# Altium PCB main.PcbDoc
Units mm, origin at the board's own origin, x right, y up, seen from the top; angles counter-clockwise.
Board outline 45.41 x 30.51 mm, 2 copper layers (Top Layer, Bottom Layer); 27 components, 19 nets, 139 pads, 0 vias.
Unrouted connection lines stored in the file: 52.
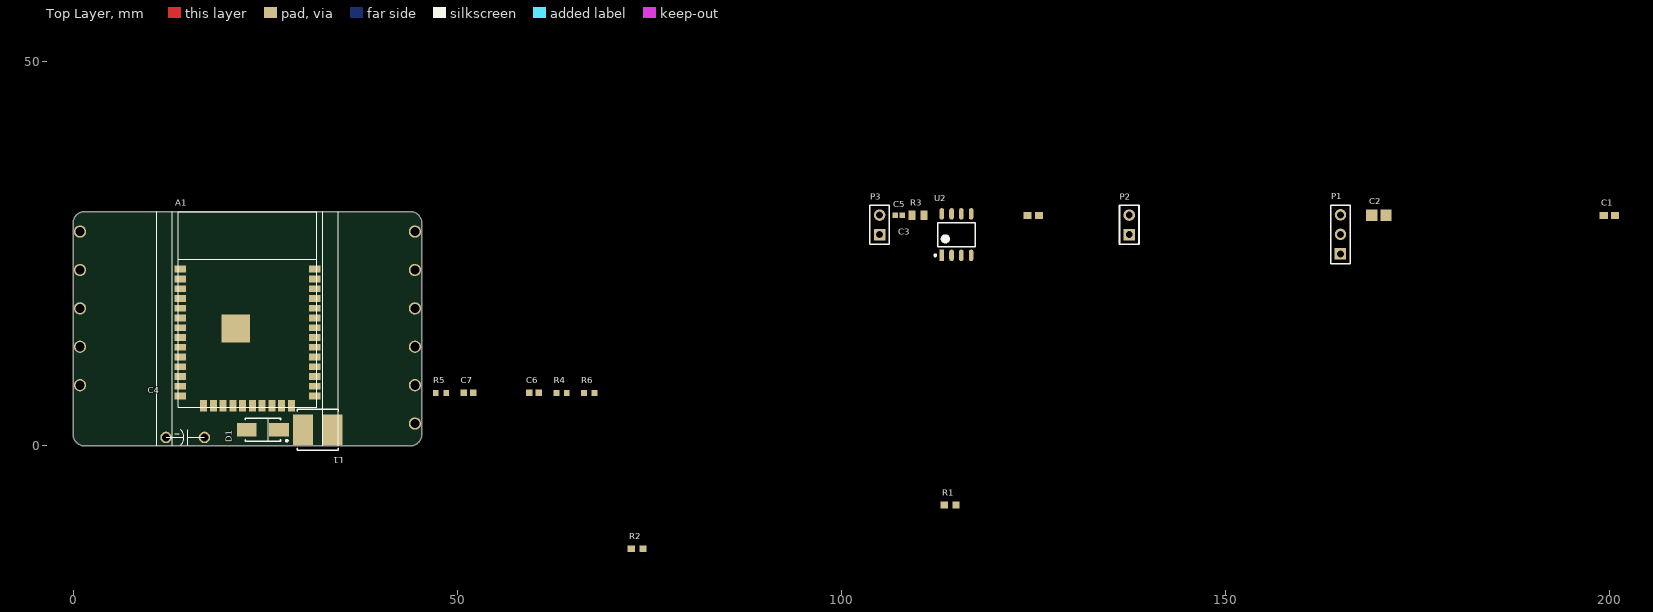
[diagram p0: Top Layer view]
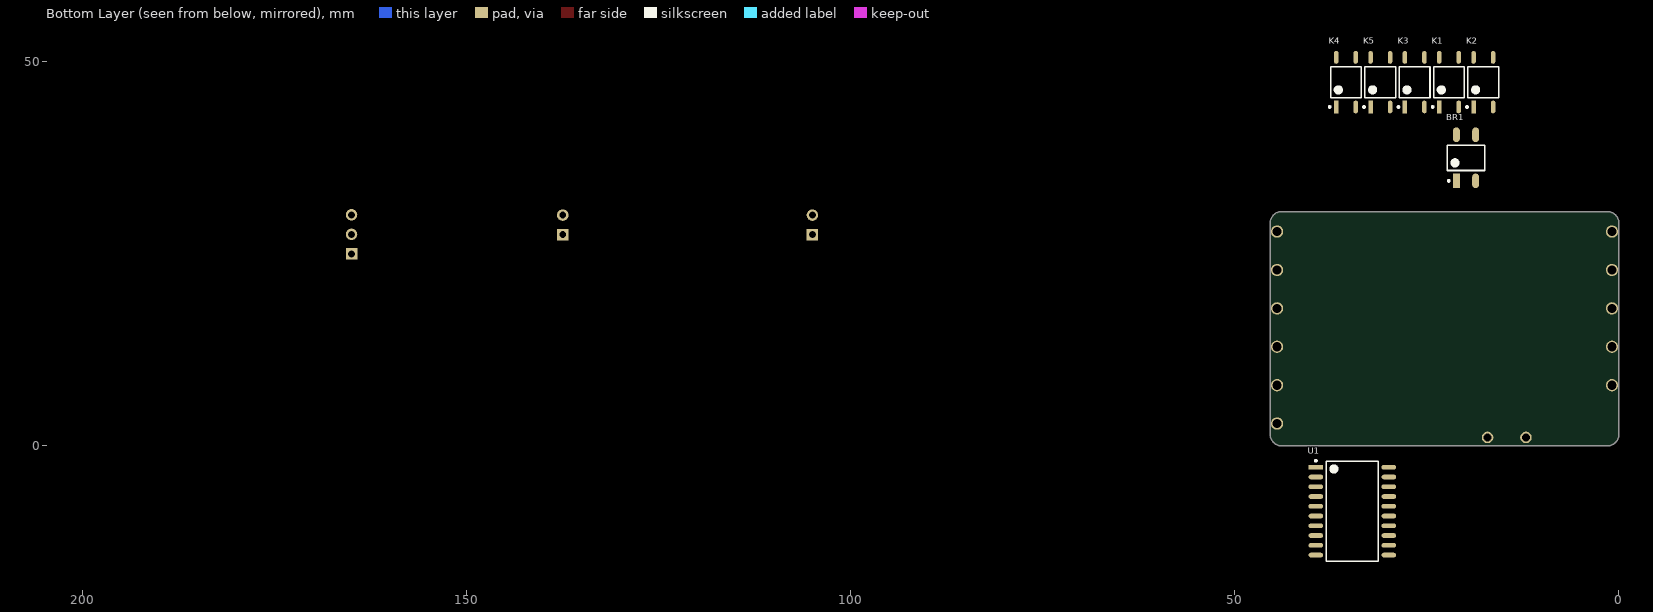
[diagram p1: Bottom Layer view, seen from below]

## Layer stack, top to bottom
Top Solder: solder mask 0.0102, Solder Resist, Dk 3.5
Top Layer: signal copper 0.0356
Dielectric 1: dielectric 0.32, FR-4, Dk 4.8
Bottom Layer: signal copper 0.0356
Bottom Solder: solder mask 0.0102, Solder Resist, Dk 3.5

## Board outline
1.5,-0.003 cw(c1.5,1.5) -0.003,1.5 0,1.5 0,29 -0.003,29 cw(c1.5,29) 1.5,30.503 1.5,30.5 43.9,30.5 43.9,30.503 cw(c43.9,29) 45.403,29 45.4,29 45.4,1.5 45.403,1.5 cw(c43.9,1.5) 43.9,-0.003 43.9,0

## Design rules (kind name [scope] priority, off if disabled: settings)
BoardOutlineClearance JLC_BoardOutlineClearance_Silk [OnLayer('Top Overlay')  or   OnLayer('Bottom Overlay')] p1: gap=0 ignorepadtopadclearanceinfootprint=FALSE
BoardOutlineClearance JLC_BoardOutlineClearance_Single [All] p2: gap=0.4 ignorepadtopadclearanceinfootprint=FALSE except(0: Arc-SplitContinuation Track-SplitContinuation SMDPad-SplitContinuation THPad-SplitContinuation Via-SplitContinuation Fill-SplitContinuation Poly-SplitContinuation Region-SplitContinuation Text-SplitContinuation; 0.2: Arc-OutlineEdge Track-OutlineEdge SMDPad-OutlineEdge THPad-OutlineEdge Via-OutlineEdge Fill-OutlineEdge Poly-OutlineEdge Region-OutlineEdge Text-OutlineEdge)
BoardOutlineClearance JLC_BoardOutlineClearance_Panel [All] p3: gap=0.4 ignorepadtopadclearanceinfootprint=FALSE except(0: Arc-SplitContinuation Track-SplitContinuation SMDPad-SplitContinuation THPad-SplitContinuation Via-SplitContinuation Fill-SplitContinuation Poly-SplitContinuation Region-SplitContinuation Text-SplitContinuation)
Clearance JLC_Clearance_SB [(HasFootprint('0603 Solder Bridge-Footprint-1'))] p1: gap=0.127 ignorepadtopadclearanceinfootprint=FALSE except(0: Fill-Hole Poly-Hole Region-Hole Text-Hole; 0.254: SMDPad-Fill SMDPad-Poly SMDPad-Region THPad-Fill THPad-Poly THPad-Region Via-Fill Via-Poly Via-Region)
Clearance JLC_Clearance_Top [All] p2: gap=0.127 ignorepadtopadclearanceinfootprint=FALSE except(0: Fill-Hole Poly-Hole Region-Hole Text-Hole; 0.2: SMDPad-Poly THPad-Poly Via-Poly)
ComponentClearance JLC_ComponentClearance [All] p1: gap=0 collisioncheckmode=3 verticalgap=0 showdistances=FALSE
ComponentOrientations JLC_ComponentOrientations [All] p1: allowedrotations=32
DiffPairsRouting [All] p1: maxlimit=0.254 minlimit=0.127 mostfreqgap=0.127 toplayer_minwidth=0.127 toplayer_maxwidth=0.254 toplayer_prefwidth=0.127 bottomlayer_minwidth=0.127 bottomlayer_maxwidth=0.254 bottomlayer_prefwidth=0.127 maxuncoupledlength=12.7
Height JLC_Height [All] p1: minheight=0 maxheight=2539.975 prefheight=12.7
HoleSize JLC_HoleSize [All] p1: absolutevalues=TRUE maxlimit=6.35 minlimit=0.3 maxpercent=80.000 minpercent=20.000
HoleToHoleClearance JLC_HoleToHoleClearance [All] p1: gap=0.254 allowstackedmicrovias=TRUE
MinimumAnnularRing JLC_MinimumAnnularRing [All] p1: minimumring=0.13
MinimumSolderMaskSliver JLC_MinimumSolderMaskSliver [All] p1: minsoldermaskwidth=0
PlaneClearance [All] p1: clearance=0.2
PlaneConnect [All] p1: planeconnectstyle=Relief reliefexpansion=0.15 reliefentries=4 reliefconductorwidth=0.254 reliefairgap=0.2
PolygonConnect [All] p1: connectstyle=Relief reliefconductorwidth=0.254 reliefentries=4 polygonreliefangle="90 Angle" airgapwidth=0.2
RoutingVias JLC_RoutingVias [All] p1: holewidth=0.3 width=0.6 viastyle="Through Hole" minholewidth=0.3 minwidth=0.6 maxholewidth=6.35 maxwidth=12.7
SilkToSilkClearance JLC_SilkToSilkClearance [All] p1: silktosilkclearance=0
SilkToSolderMaskClearance JLC_SilkToSolderMaskClearance [IsPad] p1: minsilkscreentomaskgap=0 clearancetoexposedcopper=TRUE
SolderMaskExpansion [All] p1: expansion=0.05 istentingtop=FALSE
Width JLC_Width [All] p1: maxlimit=12.7 minlimit=0.127 preferedwidth=0.254
20 further rules are at their usual default settings.

## Components (designator, comment, footprint, x,y, rotation, side; value= is the part's Value field where it differs from the comment)
A1 "ESP32-WROOM-32D" ESP32-WROOM-32D 22.7,23 r0 top
BR1 "DB 100V 0A8" "miniDIP 4" 19.9,37.5 r90 bottom
C1 "100n 16V" "CAP 0603 MD" 200,30 r0 top
C2 "10u 16V" "CAP 0805 LD" 170,30 r0 top
C3 "1u 25V" "CAP 0603 MD" 125,30 r0 top
C4 "330u 50V" "ELECTROLYTIC CAP D10 lifted" 14.6,1.1 r0 top
C5 "10n 50V" CAP0402X07 107.5,30 r0 top
C6 "100n 16V" "CAP 0603 HD" 60,6.9 r0 top
C7 "1n5 50V" "CAP 0603 HD" 51.5,6.9 r0 top
D1 "DS -50V 700mV 1A" DO-214AC 24.7,2.1 r180 top
K1 "TLP266J" "11-4M1S MD" 22.12,47.346 r90 bottom
K2 "TLP266J" "11-4M1S MD" 17.65,47.346 r90 bottom
K3 "TLP266J" "11-4M1S MD" 26.59,47.346 r90 bottom
K4 "TLP266J" "11-4M1S MD" 35.53,47.346 r90 bottom
K5 "TLP266J" "11-4M1S MD" 31.06,47.346 r90 bottom
L1 "150u A560 R949" "IND 5050X45 MD" 31.85,2.1 r180 top
P1 "Header 3" HDR1X3 165,25 r90 top
P2 "Header 2" HDR1X2 137.5,27.5 r90 top
P3 "Header 2" HDR1X2 105,27.5 r90 top
R1 "10k 1% 0W1" "RES 0603 MD" 114.175,-7.7 r0 top
R2 "10k 1% 0W1" "RES 0603 MD" 73.425,-13.4 r0 top
R3 "0R5 1% 0W33" "RES 0805 HD" 110,30 r0 top
R4 "36k 0.5 52m5" "RES 0603 HD" 63.6,6.9 r0 top
R5 "22k 1% 0W1" "RES 0603 HD" 47.9,6.9 r0 top
R6 "12k 1% 0W1" "RES 0603 HD" 67.2,6.9 r0 top
U1 "SN74ACT244DWR" "SOIC 20 w7.5 MD" 34.7,-8.5 r180 bottom
U2 "NCP3064BDR2G" "soic-8 md" 115,27.5 r90 top

## Footprints (in the part's own frame and the unit in brackets; to place one, negate y for a bottom-side part, rotate by r counter-clockwise, add the part's x,y. Pads: shape width x height; smd on the part's side, far side on the other; paste and mask are expansions set on the pad)
"11-4M1S MD" [mm] "SOP, 4-Leads, Body 3.75x4.60mm, Pitch 2.54mm, IPC Medium Density"
  rect 1.65x0.6 smd: 1(-3.225,1.27)
  oval 1.65x0.6 smd: 3(-3.225,-1.27) 4(3.225,-1.27) 6(3.225,1.27)
  silkscreen extent -3.35,-2 2,2.25, body extent -3.5,-2 3.5,2, height 2.2
CAP0402X07 [mm] "Chip Capacitor, 2-Leads, Body 1.00x0.50mm, IPC Medium Density"
  rect 0.72x0.72 smd: 1(-0.45,0) 2(0.45,0)
  body extent -0.6,-0.35 0.6,0.35, height 0.7
"CAP 0603 HD" [mm] "Chip Capacitor, 2-Leads, Body 1.60x0.80mm, IPC High Density"
  rect 0.85x0.85 smd: 1(-0.625,0) 2(0.625,0)
  body extent -0.85,-0.45 0.85,0.45, height 0.9
"CAP 0603 MD" [mm] "Chip Capacitor, 2-Leads, Body 1.60x0.80mm, IPC Medium Density"
  rect 1.05x0.95 smd: 1(-0.725,0) 2(0.725,0)
  body extent -0.85,-0.45 0.85,0.45, height 0.9
"CAP 0805 LD" [mm] "Chip Capacitor, 2-Leads, Body 2.00x1.25mm, IPC Low Density"
  rect 1.45x1.5 smd: 1(-0.925,0) 2(0.925,0)
  body extent -1.1,-0.67 1.1,0.67, height 1.35
DO-214AC [mm] "Molded Diode, 2-Leads, Body 4.29x2.61mm, IPC Medium Density"
  rect 2.55x1.75 smd: 1(-2.1,0) 2(2.1,0)
  silkscreen extent -3.25,-1.5 2.3,1.55, body extent -2.5,-1.46 2.5,1.46, height 2.44
"ELECTROLYTIC CAP D10 lifted" [mm]
  round 1.5 hole 1 mask+0.05: 1(-2.5,0) 2(2.5,0)
  silkscreen extent -2.5,-1 2.5,1
ESP32-WROOM-32D [mm]
  rect 1.5x0.9 smd mask+0.05: 1(-8.75,0) 2(-8.75,-1.27) 3(-8.75,-2.54) 4(-8.75,-3.81) 5(-8.75,-5.08) 6(-8.75,-6.35) 7(-8.75,-7.62) 8(-8.75,-8.89) 9(-8.75,-10.16) 10(-8.75,-11.43) 11(-8.75,-12.7) 12(-8.75,-13.97) 13(-8.75,-15.24) 14(-8.75,-16.51) 25(8.75,-16.51) 26(8.75,-15.24) 27(8.75,-13.97) 28(8.75,-12.7) 29(8.75,-11.43) 30(8.75,-10.16) 31(8.75,-8.89) 32(8.75,-7.62) 33(8.75,-6.35) 34(8.75,-5.08) 35(8.75,-3.81) 36(8.75,-2.54) 37(8.75,-1.27) 38(8.75,0)
  rect 0.9x1.5 smd mask+0.05: 15(-5.715,-17.76) 16(-4.445,-17.76) 17(-3.175,-17.76) 18(-1.905,-17.76) 19(-0.635,-17.76) 20(0.635,-17.76) 21(1.905,-17.76) 22(3.175,-17.76) 23(4.445,-17.76) 24(5.715,-17.76)
  rect 3.7x3.7 smd mask+0.05: 39(-1.5,-7.72)
  silkscreen extent -9,-18 9,7.5, body extent -9,-18 8.9,7.4, height 2.62
HDR1X2 [mm] "Connector; Header; 2 Position"
  rect 1.5x1.5 hole 0.9: 1(0,0)
  round 1.5 hole 0.9: 2(2.54,0)
  silkscreen extent -1.27,-1.27 3.81,1.27
HDR1X3 [mm] "Connector; Header; 3 Position"
  rect 1.5x1.5 hole 0.9: 1(0,0)
  round 1.5 hole 0.9: 2(2.54,0) 3(5.08,0)
  silkscreen extent -1.27,-1.27 6.35,1.27
"IND 5050X45 MD" [mm] "Precision Wire Wound Inductor, 2-Leads, Body 5.00x5.00mm, IPC Medium Density"
  rect 2.6x4 smd: 1(-1.95,0) 2(1.95,0)
  silkscreen extent -2.65,-2.65 2.65,2.65, body extent -2.6,-2.5 2.6,2.5, height 4.6
"miniDIP 4" [mm] "SOP, 4-Leads, Body 4.70x3.80mm, Pitch 2.50mm, IPC Medium Density"
  rect 1.9x0.9 smd: 1(-3,1.25)
  oval 1.9x0.9 smd: 2(-3,-1.25) 3(3,-1.25) 4(3,1.25)
  silkscreen extent -3.12,-2.45 1.65,2.45, body extent -3.5,-2.45 3.5,2.45, height 3
"RES 0603 HD" [mm] "Chip Resistor, 2-Leads, Body 1.60x0.80mm, IPC High Density"
  rect 0.75x0.8 smd: 1(-0.675,0) 2(0.675,0)
  body extent -0.9,-0.45 0.9,0.45, height 0.55
"RES 0603 MD" [mm] "Chip Resistor, 2-Leads, Body 1.60x0.80mm, IPC Medium Density"
  rect 0.95x0.9 smd: 1(-0.775,0) 2(0.775,0)
  body extent -0.9,-0.45 0.9,0.45, height 0.55
"RES 0805 HD" [mm] "Chip Resistor, 2-Leads, Body 2.00x1.25mm, IPC High Density"
  rect 0.95x1.25 smd: 1(-0.775,0) 2(0.775,0)
  body extent -1.1,-0.67 1.1,0.67, height 0.6
"SOIC 20 w7.5 MD" [mm] "SOIC, 20-Leads, Body 12.80x7.50mm, Pitch 1.27mm, IPC Medium Density"
  rect 1.9x0.6 smd: 1(-4.75,5.715)
  oval 1.9x0.6 smd: 2(-4.75,4.445) 3(-4.75,3.175) 4(-4.75,1.905) 5(-4.75,0.635) 6(-4.75,-0.635) 7(-4.75,-1.905) 8(-4.75,-3.175) 9(-4.75,-4.445) 10(-4.75,-5.715) 11(4.75,-5.715) 12(4.75,-4.445) 13(4.75,-3.175) 14(4.75,-1.905) 15(4.75,-0.635) 16(4.75,0.635) 17(4.75,1.905) 18(4.75,3.175) 19(4.75,4.445) 20(4.75,5.715)
  silkscreen extent -4.88,-6.5 3.4,6.69, body extent -5.15,-6.5 5.15,6.5, height 2.65
"soic-8 md" [mm] "SOIC, 8-Leads, Body 4.90x3.90mm, Pitch 1.27mm, IPC Medium Density"
  rect 1.5x0.6 smd: 1(-2.7,1.905)
  oval 1.5x0.6 smd: 2(-2.7,0.635) 3(-2.7,-0.635) 4(-2.7,-1.905) 5(2.7,-1.905) 6(2.7,-0.635) 7(2.7,0.635) 8(2.7,1.905)
  silkscreen extent -2.82,-2.45 1.55,2.88, body extent -3,-2.45 3,2.45, height 1.75

## Part data
BR1: "Bridge Rectifier 100V 0.8A MiniDIP SMD4", Average Rectified Current=800mA, Capacitance=10pF, Case/Package=SMD/SMT, Forward Current=400mA, Forward Voltage=1V, Manufacturer 1=Diodes, Manufacturer Part Number 1=HD01-T, Max Forward Surge Current (Ifsm)=30A, Max Operating Temperature=150°C, Max Repetitive Reverse Voltage (Vrrm)=100V, Max Reverse Current=5uA, Min Operating Temperature=-55°C, Package Quantity=3000, Reverse Voltage (DC)=70V, Supplier Part Number 1=HD01DICT-ND, Category="Rectifier Diodes", ComponentLink1Description=https://datasheet.ciiva.com/11196/ds17003-11196328.pdf?src-supplier=Avnet, ComponentLink1URL=https://datasheet.ciiva.com/11196/ds17003-11196328.pdf?src-supplier=Avnet, ComponentLink2Description=https://datasheet.ciiva.com/34302/1540412-34302391.pdf?src-supplier=Jameco, ComponentLink2URL=https://datasheet.ciiva.com/34302/1540412-34302391.pdf?src-supplier=Jameco, ComponentLink3Description=https://datasheet.ciiva.com/4433/ds17003-4433579.pdf?src-supplier=Mouser, ComponentLink3URL=https://datasheet.ciiva.com/4433/ds17003-4433579.pdf?src-supplier=Mouser, ComponentLink4Description=https://datasheet.ciiva.com/16583/ds17003-16583723.pdf?src-supplier=Avnet+Europe, ComponentLink4URL=https://datasheet.ciiva.com/16583/ds17003-16583723.pdf?src-supplier=Avnet+Europe, ComponentLink5Description=https://datasheet.ciiva.com/1175/ds17003-1175220.pdf?src-supplier=Element14, ComponentLink5URL=https://datasheet.ciiva.com/1175/ds17003-1175220.pdf?src-supplier=Element14, ComponentLink6Description=https://datasheet.ciiva.com/16358/ds17003-16358441.pdf?src-supplier=Future+Electronics, ComponentLink6URL=https://datasheet.ciiva.com/16358/ds17003-16358441.pdf?src-supplier=Future+Electronics, ComponentLink7Description=https://datasheet.ciiva.com/15224/getdatasheetpartid-142523-15224709.pdf?src-supplier=Verical, ComponentLink7URL=https://datasheet.ciiva.com/15224/getdatasheetpartid-142523-15224709.pdf?src-supplier=Verical, Contact Plating=Tin,Matte, Current Rating=800mA, Element Configuration=Single, Height=2.7mm, Lead Free="Lead Free", Length=4.9mm, Max Surge Current=30A, Mount="Surface Mount", Number of Elements=1, Number of Pins=4, Output Current=800mA, Packaging="Tape and Reel", Peak Non-Repetitive Surge Current=30A, Pricing 1="1=0.45000, 10=0.36200, 100=0.24640, 500=0.18480, 1000=0.13860 (USD)", Radiation Hardening=No, REACH SVHC="No SVHC", RoHS=Yes, RoHS Compliant=Yes, Series=-, Stock 1=99228, Supplier 1=Digi-Key, Termination=SMD/SMT, Voltage Rating (DC)=100V, Width=4mm
C1 C6: library part "CAP 100n 16V 0603", "CAP CER 0.1UF 16V X7R 0603", Capacitance=100nF, Case Code (Imperial)=0603, Case Code (Metric)=1608, Dielectric=X7R, Dielectric Material=Ceramic, Manufacturer 1=KEMET, Manufacturer Part Number 1=C0603C104M4RACTU, Max Operating Temperature=125°C, Min Operating Temperature=-55°C, Package Quantity=1, Supplier Part Number 1=399-1099-1-ND, Tolerance=20%, Voltage Rating=16V, Case/Package=0603, Category="Ceramic Capacitors", ComponentLink1Description=https://datasheet.ciiva.com/18102/getdatasheetpartid-66190-18102310.pdf?src-supplier=Verical, ComponentLink1URL=https://datasheet.ciiva.com/18102/getdatasheetpartid-66190-18102310.pdf?src-supplier=Verical, ComponentLink2Description=https://datasheet.ciiva.com/7823/kem-c1002-x7r-smd-7823992.pdf?src-supplier=Element14, ComponentLink2URL=https://datasheet.ciiva.com/7823/kem-c1002-x7r-smd-7823992.pdf?src-supplier=Element14, ComponentLink3Description=https://datasheet.ciiva.com/7823/kem-c1002-x7r-smd-7823993.pdf?src-supplier=Element14, ComponentLink3URL=https://datasheet.ciiva.com/7823/kem-c1002-x7r-smd-7823993.pdf?src-supplier=Element14, ComponentLink4Description=https://datasheet.ciiva.com/14589/70095383-14589450.pdf?src-supplier=Allied+Electronics, ComponentLink4URL=https://datasheet.ciiva.com/14589/70095383-14589450.pdf?src-supplier=Allied+Electronics, ComponentLink5Description=https://datasheet.ciiva.com/18192/getdatasheetpartid-302288-18192716.pdf?src-supplier=Verical, ComponentLink5URL=https://datasheet.ciiva.com/18192/getdatasheetpartid-302288-18192716.pdf?src-supplier=Verical, Depth=0.8mm, Height=0.8mm, Lead Pitch=0.7mm, Length=1.6mm, Mount="Surface Mount,PCB", Number of Pins=2, Packaging="Tape and Reel", Pricing 1="1=0.10000, 10=0.03500, 50=0.01880, 100=0.01540, 500=0.01102, 1000=0.00865 (USD)", Radiation Hardening=No, REACH SVHC="No SVHC", RoHS=Yes, Stock 1=125497, Supplier 1=Digi-Key, Termination=SMD/SMT, Thickness=0.034inch, Voltage Rating (DC)=16V, Width=0.031inch
C2: library part "CAP 10u 16V 0805", "SAMSUNG ELECTRO-MECHANICS - CL21A106KOQNNNE - SMD Multilayer Ceramic Capacitor, 10 µF, 16 V, 0805 [2012 Metric], ± 10%, X5R, CL Series", Capacitance=10uF, Case Code (Imperial)=0805, Case Code (Metric)=2012, Dielectric=X7R, Manufacturer 1=Samsung, Manufacturer Part Number 1=CL21A106KOQNNNE, Max Operating Temperature=85°C, Min Operating Temperature=-55°C, Package Quantity=1, Supplier Part Number 1=1276-1096-1-ND, Tolerance=10%, Voltage=16V, Case/Package=0805, Category="Ceramic Capacitors", ComponentLink1Description=https://datasheet.ciiva.com/25798/cl21a106koqnnne-25798133.pdf?src-supplier=Digi-Key, ComponentLink1URL=https://datasheet.ciiva.com/25798/cl21a106koqnnne-25798133.pdf?src-supplier=Digi-Key, ComponentLink2Description=https://datasheet.ciiva.com/15216/getdatasheetpartid-358435-15216234.pdf?src-supplier=Verical, ComponentLink2URL=https://datasheet.ciiva.com/15216/getdatasheetpartid-358435-15216234.pdf?src-supplier=Verical, ComponentLink3Description=https://datasheet.ciiva.com/16740/cl05b104kq5nnnc-16740697.pdf?src-supplier=Future+Electronics, ComponentLink3URL=https://datasheet.ciiva.com/16740/cl05b104kq5nnnc-16740697.pdf?src-supplier=Future+Electronics, Depth=1.25mm, Height=1.25mm, Lead Free="Lead Free", Length=2mm, Mount="Surface Mount", Packaging="Tape and Reel", Pricing 1="1=0.11000, 10=0.07600, 50=0.04340, 100=0.03590, 500=0.02516, 1000=0.02083 (USD)", Radiation Hardening=No, RoHS=Yes, Stock 1=920017, Supplier 1=Digi-Key, Thickness=0.055inch, Voltage Rating=16V, Voltage Rating (DC)=16V, Width=0.049inch
C3: library part "CAP 1u 25V 0603", "SAMSUNG ELECTRO-MECHANICS - CL10B105KA8NNNC - SMD Multilayer Ceramic Capacitor, 1 µF, 25 V, 0603 [1608 Metric], ± 10%, X7R, CL Series", Capacitance=1uF, Case Code (Imperial)=0603, Case Code (Metric)=1608, Dielectric=X7R, Manufacturer 1=Samsung, Manufacturer Part Number 1=CL10B105KA8NNNC, Max Operating Temperature=125°C, Min Operating Temperature=-55°C, Package Quantity=1, Supplier Part Number 1=1276-1184-1-ND, Tolerance=10%, Voltage=25V, Case/Package=0603, Category="Ceramic Capacitors", ComponentLink1Description=https://datasheet.ciiva.com/16449/cl10b105ka8nnnc-16449544.pdf?src-supplier=Future+Electronics, ComponentLink1URL=https://datasheet.ciiva.com/16449/cl10b105ka8nnnc-16449544.pdf?src-supplier=Future+Electronics, ComponentLink2Description=https://datasheet.ciiva.com/15195/getdatasheetpartid-359554-15195726.pdf?src-supplier=Verical, ComponentLink2URL=https://datasheet.ciiva.com/15195/getdatasheetpartid-359554-15195726.pdf?src-supplier=Verical, Contact Plating=Tin, Depth=0.8mm, Height=0.8mm, Length=1.6mm, Mount="Surface Mount", Packaging="Tape and Reel", Pricing 1="1=0.10000, 10=0.05100, 50=0.02780, 100=0.02260, 500=0.01618, 1000=0.01271 (USD)", Radiation Hardening=No, RoHS=Yes, Stock 1=3430244, Supplier 1=Digi-Key, Thickness=0.035inch, Voltage Rating=25V, Width=0.031inch
C4: library part "CAP-EL 330u 50V"
C5: library part "CAP 10n 0402", "10nF ±10% 50V X7R 0402 Multilayer Ceramic Capacitors MLCC - SMD/SMT RoHS", LCSC Part #=C466608
C7: library part "CAP 1n5 50V 0603", "Multilayer Ceramic Capacitors MLCC - SMD/SMT 50V 1500pF X7R 0603 10% Tol", Capacitance=1.5nF, Case Code (Imperial)=0603, Case Code (Metric)=1608, Dielectric=X7R, Manufacturer 1="Kyocera AVX", Manufacturer Part Number 1=06035C152KAT4A, Max Operating Temperature=125°C, Min Operating Temperature=-55°C, Supplier Part Number 1=478-13035-1-ND, Tolerance=10%, Voltage Rating (DC)=50V, Case/Package=0603, Category="Ceramic Capacitors", ComponentLink1Description=https://datasheet.ciiva.com/11537/cx7r-11537941.pdf?src-supplier=Avnet, ComponentLink1URL=https://datasheet.ciiva.com/11537/cx7r-11537941.pdf?src-supplier=Avnet, ComponentLink2Description=https://datasheet.ciiva.com/13266/cx7r-218113-13266958.pdf?src-supplier=Mouser, ComponentLink2URL=https://datasheet.ciiva.com/13266/cx7r-218113-13266958.pdf?src-supplier=Mouser, Construction=Flat, Depth=0.81mm, Height=0.9mm, Length=1.6mm, Mount="Surface Mount", Number of Pins=2, Packaging="Tape and Reel", Pricing 1="1=0.10000, 10=0.07000, 50=0.03800, 100=0.03100, 500=0.02214, 1000=0.01739, 2500=0.01581, 5000=0.01455 (USD)", Radiation Hardening=No, RoHS=Yes, RoHS Compliant=Yes, Stock 1=28742, Supplier 1=Digi-Key, Termination=SMD/SMT, Weight=7.1E-05oz, Width=0.81mm
D1: "DIODE SCHOTTKY 50V 1A SMAE", Average Rectified Current=1A, Forward Voltage=700mV, Manufacturer 1=MCC, Manufacturer Part Number 1=SS15E-TP, Max Forward Surge Current (Ifsm)=30A, Max Operating Temperature=150°C, Max Repetitive Reverse Voltage (Vrrm)=50V, Max Reverse Current=20mA, Min Operating Temperature=-55°C, Package Quantity=1, Supplier Part Number 1=SS15E-TPMSCT-ND, Category="Rectifier Diodes", ComponentLink1Description=https://datasheet.ciiva.com/912/ss12e-ss110esmae-912129.pdf?src-supplier=Digi-Key, ComponentLink1URL=https://datasheet.ciiva.com/912/ss12e-ss110esmae-912129.pdf?src-supplier=Digi-Key, ComponentLink2Description=https://datasheet.ciiva.com/912/ss12e-ss110esmae-912130.pdf?src-supplier=Digi-Key, ComponentLink2URL=https://datasheet.ciiva.com/912/ss12e-ss110esmae-912130.pdf?src-supplier=Digi-Key, ComponentLink3Description=https://datasheet.ciiva.com/912/ss12e-ss110esmae-912131.pdf?src-supplier=Digi-Key, ComponentLink3URL=https://datasheet.ciiva.com/912/ss12e-ss110esmae-912131.pdf?src-supplier=Digi-Key, Forward Current=1A, Lead Free="Lead Free", Max Reverse Voltage (DC)=50V, Mount="Surface Mount", Number of Pins=2, Packaging="Tape and Reel", Pricing 1="1=0.36000, 10=0.29600, 100=0.15680, 500=0.10312, 1000=0.07012, 2000=0.06325 (USD)", RoHS=Yes, RoHS Compliant=Yes, Series=-, Stock 1=2654, Supplier 1=Digi-Key
K1 K2 K3 K4 K5: "OPTOISOLATOR 3.75KV TRIAC 6SO 4L", Case/Package=SMD/SMT, Forward Voltage=1.27V, Hold Current=600uA, Manufacturer 1=Toshiba, Manufacturer Part Number 1=TLP266J(T7-TPL,E, Max Input Voltage=1.4V, Max Operating Temperature=100°C, Min Operating Temperature=-40°C, RMS Current (Irms)=70mA, Supplier Part Number 1=TLP266J(T7-TPLECT-ND, Approvals=UL, Category=Uncategorized, ComponentLink1Description=https://datasheet.ciiva.com/24075/tlp266j-datasheet-en-20140619-24075350.pdf?src-supplier=Digi-Key, ComponentLink1URL=https://datasheet.ciiva.com/24075/tlp266j-datasheet-en-20140619-24075350.pdf?src-supplier=Digi-Key, ComponentLink2Description=https://datasheet.ciiva.com/41848/tlp266j-datasheet-en-20150313-41848894.pdf?src-supplier=Digi-Key, ComponentLink2URL=https://datasheet.ciiva.com/41848/tlp266j-datasheet-en-20150313-41848894.pdf?src-supplier=Digi-Key, ComponentLink3Description=https://datasheet.ciiva.com/41848/tlp266j-datasheet-en-20150313-41848895.pdf?src-supplier=Digi-Key, ComponentLink3URL=https://datasheet.ciiva.com/41848/tlp266j-datasheet-en-20150313-41848895.pdf?src-supplier=Digi-Key, ComponentLink4Description=https://datasheet.ciiva.com/30015/tlp266j-datasheet-en-20150313-30015518.pdf?src-supplier=Avnet, ComponentLink4URL=https://datasheet.ciiva.com/30015/tlp266j-datasheet-en-20150313-30015518.pdf?src-supplier=Avnet, Mount="Surface Mount", Nominal Input Voltage=1.27V, Number of Channels=1, Number of Pins=4, Packaging="Tape and Reel", Pricing 1="1=0.92000, 10=0.59900, 100=0.39270, 1000=0.31005 (USD)", Radiation Hardening=No, RoHS=No, Stock 1=1517, Supplier 1=Digi-Key, Turn-On Delay Time=30us
L1: library part "IND 150u 560mA", "FIXED IND 150UH 610MA 949 MOHM", Case/Package=Nonstandard, Current Rating=610mA, DC Resistance (DCR)=949mR, Inductance=150uH, Manufacturer 1=TDK, Manufacturer Part Number 1=VLS5045EX-151M, Max Operating Temperature=105°C, Min Operating Temperature=-40°C, Resistor Type=Wirewound, Saturation Current=560mA, Supplier Part Number 1=445-174857-1-ND, Test Frequency=100kHz, Tolerance=20%, ComponentLink1Description=https://media.digikey.com/pdf/Data%20Sheets/TDK%20PDFs/VLS-EX_Series_Br.pdf?src-supplier=Digi-Key, ComponentLink1URL=https://media.digikey.com/pdf/Data%20Sheets/TDK%20PDFs/VLS-EX_Series_Br.pdf?src-supplier=Digi-Key, ComponentLink2Description=https://product.tdk.com/info/en/catalog/datasheets/inductor_commercial_power_vls5045ex_en.pdf?src-supplier=Digi-Key, ComponentLink2URL=https://product.tdk.com/info/en/catalog/datasheets/inductor_commercial_power_vls5045ex_en.pdf?src-supplier=Digi-Key, Core Material=Ferrite, Mount="Surface Mount", Packaging="Tape and Reel", Pricing 1="1=0.46000, 10=0.40400, 25=0.37520, 50=0.31760, 100=0.28880, 250=0.27144, 500=0.24256 (USD)", RoHS=Yes, RoHS Compliant=Yes, Shielding=Shielded, Stock 1=800, Supplier 1=Digi-Key
P1: "Header, 3-Pin", LatestRevisionDate=17-Jul-2002, LatestRevisionNote="Re-released for DXP Platform.", Publisher="Altium Limited"
P2 P3: "Header, 2-Pin", LatestRevisionDate=17-Jul-2002, LatestRevisionNote="Re-released for DXP Platform.", Publisher="Altium Limited"
R1 R2: library part "RES 10k 0603 1% 0W1", "PANASONIC - ERJ-3EKF1002V. - THICK FILM CHIP RES, 0603, 1%, PRECISION", Case Code (Imperial)=0603, Case Code (Metric)=1608, Manufacturer 1=Panasonic, Manufacturer Part Number 1=ERJ-3EKF1002V, Max Operating Temperature=155°C, Max Power Dissipation=100mW, Min Operating Temperature=-55°C, Package Quantity=1, Resistance=10kR, Resistance Tolerance=1%, Resistor Type="Thick Film", Supplier Part Number 1=P10.0KHCT-ND, Temperature Coefficient=100ppm/°C, Voltage Rating=75V, Case/Package=0603, Category="Chip SMD Resistors", ComponentLink1Description=https://datasheet.ciiva.com/48530/aoa0000ce2-48530988.pdf?src-supplier=Avnet, ComponentLink1URL=https://datasheet.ciiva.com/48530/aoa0000ce2-48530988.pdf?src-supplier=Avnet, ComponentLink2Description=https://datasheet.ciiva.com/24070/aoa0000ce2-24070318.pdf?src-supplier=Mouser, ComponentLink2URL=https://datasheet.ciiva.com/24070/aoa0000ce2-24070318.pdf?src-supplier=Mouser, ComponentLink3Description=https://datasheet.ciiva.com/9194/aoa0000ce2-9194199.pdf?src-supplier=Avnet, ComponentLink3URL=https://datasheet.ciiva.com/9194/aoa0000ce2-9194199.pdf?src-supplier=Avnet, Construction=Rectangular, Contact Plating=Tin, Depth=0.8mm, Features="Automotive AEC-Q200", Height=0.45mm, Lead Free="Lead Free", Length=1.6mm, Military Standard=Not, Mount="Surface Mount", Number of Pins=2, Number of Terminations=2, Packaging="Tape and Reel", Power Rating=100mW, Pricing 1="1=0.10000, 10=0.03700, 100=0.01490, 1000=0.00670, 2500=0.00582 (USD)", Radiation Hardening=No, REACH SVHC="No SVHC", RoHS=Yes, RoHS Compliant=Yes, Series=ERJ, Size Code=0603, Stock 1=4395630, Supplier 1=Digi-Key, Technology="THICK FILM", Termination=SMD/SMT, Tolerance=1%, Voltage Rating (DC)=75V, Width=0.031inch
R3: library part "RES 0R5 0805 1% 0W33", "SUSUMU         RL1220S-R50-F             SMD Current Sense Resistor, 0.5 ohm, 0805 [2012 Metric], 250 mW,  1%, RL Series", Case Code (Imperial)=0805, Case Code (Metric)=2012, Manufacturer 1=Susumu, Manufacturer Part Number 1=RL1220S-R50-F, Max Operating Temperature=125°C, Max Power Dissipation=333mW, Min Operating Temperature=-55°C, Package Quantity=1, Power Rating=250mW, Resistance=500mR, Resistance Tolerance=1%, Resistor Type="Thin Film", Supplier Part Number 1=RL12S.50FCT-ND, Temperature Coefficient=200ppm/°C, Voltage Rating (DC)=100V, Case/Package=0805, Category="Chip SMD Resistors", ComponentLink1Description=https://datasheet.ciiva.com/2487/rl-data-sheet-2487714.pdf?src-supplier=Digi-Key, ComponentLink1URL=https://datasheet.ciiva.com/2487/rl-data-sheet-2487714.pdf?src-supplier=Digi-Key, ComponentLink2Description=https://datasheet.ciiva.com/2487/rl-data-sheet-2487715.pdf?src-supplier=Digi-Key, ComponentLink2URL=https://datasheet.ciiva.com/2487/rl-data-sheet-2487715.pdf?src-supplier=Digi-Key, ComponentLink3Description=https://datasheet.ciiva.com/2487/rl-data-sheet-2487716.pdf?src-supplier=Digi-Key, ComponentLink3URL=https://datasheet.ciiva.com/2487/rl-data-sheet-2487716.pdf?src-supplier=Digi-Key, ComponentLink4Description=https://datasheet.ciiva.com/12837/e-15-16-12837656.pdf?src-supplier=Mouser, ComponentLink4URL=https://datasheet.ciiva.com/12837/e-15-16-12837656.pdf?src-supplier=Mouser, ComponentLink5Description=https://datasheet.ciiva.com/7984/87305-7984266.pdf?src-supplier=Element14, ComponentLink5URL=https://datasheet.ciiva.com/7984/87305-7984266.pdf?src-supplier=Element14, Height=0.02inch, Lead Free="Lead Free", Length=0.079inch, Number of Pins=2, Number of Terminations=2, Packaging="Tape and Reel", Pricing 1="1=0.29000, 10=0.24300, 25=0.17640, 50=0.12780, 100=0.09480, 250=0.07276, 500=0.05732, 1000=0.03969 (USD)", REACH SVHC=Unknown, RoHS=No, Series=RL, Size Code=0805, Stock 1=56487, Supplier 1=Digi-Key, Technology="THIN FILM", Termination=SMD/SMT, Tolerance=1%, Weight=0.000194oz, Width=0.049inch
R4: library part "RES 36k 0603 0%5 62m5", "RES SMD 36K OHM 0.5% 1/16W 0603", Case Code (Imperial)=0603, Case Code (Metric)=1608, Manufacturer 1=Susumu, Manufacturer Part Number 1=RR0816P-363-D, Max Operating Temperature=125°C, Max Power Dissipation=63mW, Min Operating Temperature=-55°C, Package Quantity=1, Power Rating=62.5mW, Resistance=36kR, Resistor Type="Thin Film", Supplier Part Number 1=RR08P36.0KDCT-ND, Temperature Coefficient=25ppm/°C, Tolerance=0.5%, Voltage Rating=75V, Case/Package=0603, Category="Chip SMD Resistors", ComponentLink1Description=https://datasheet.ciiva.com/11820/0900766b80808d64-11820413.pdf?src-supplier=RSComponents, ComponentLink1URL=https://datasheet.ciiva.com/11820/0900766b80808d64-11820413.pdf?src-supplier=RSComponents, ComponentLink2Description=https://datasheet.ciiva.com/2487/rr-data-sheet-2487307.pdf?src-supplier=Digi-Key, ComponentLink2URL=https://datasheet.ciiva.com/2487/rr-data-sheet-2487307.pdf?src-supplier=Digi-Key, ComponentLink3Description=https://datasheet.ciiva.com/2487/rr-data-sheet-2487308.pdf?src-supplier=Digi-Key, ComponentLink3URL=https://datasheet.ciiva.com/2487/rr-data-sheet-2487308.pdf?src-supplier=Digi-Key, ComponentLink4Description=https://datasheet.ciiva.com/2487/rr-data-sheet-2487309.pdf?src-supplier=Digi-Key, ComponentLink4URL=https://datasheet.ciiva.com/2487/rr-data-sheet-2487309.pdf?src-supplier=Digi-Key, Depth=0.8mm, Height=0.4mm, Height - Seated (Max)=0.02inch, Lead Free="Lead Free", Length=0.063inch, Mount="Surface Mount", Number of Pins=2, Number of Terminations=2, Packaging="Tape and Reel", Pricing 1="1=0.10000, 10=0.08500, 100=0.03260, 1000=0.01432, 2500=0.01237 (USD)", RoHS=Yes, Stock 1=20789, Supplier 1=Digi-Key, Termination=SMD/SMT, Voltage Rating (DC)=75V, Width=0.032inch
R5: library part "RES 22k 0603 1% 0W1", "Res Thick Film 0603 22K Ohm 1% 1/10W 100ppm/C Molded SMD SMD Paper T/R", Case Code (Imperial)=0603, Case Code (Metric)=1608, Manufacturer 1="Stackpole Electronics", Manufacturer Part Number 1=RMCF0603FG22K0, Max Operating Temperature=155°C, Max Power Dissipation=100mW, Min Operating Temperature=-55°C, Resistance=22kR, Resistor Type="Thick Film", Supplier Part Number 1=RMCF0603FG22K0CT-ND, Temperature Coefficient=100ppm/°C, Tolerance=1%, Case/Package=0603, Category="Chip SMD Resistors", ComponentLink1Description=https://www.seielect.com/catalog/SEI-RMCF_RMCP.pdf?src-supplier=Avnet, ComponentLink1URL=https://www.seielect.com/catalog/SEI-RMCF_RMCP.pdf?src-supplier=Avnet, ComponentLink2Description=https://www.seielect.com/catalog/SEI-Packaging.pdf?src-supplier=Digi-Key, ComponentLink2URL=https://www.seielect.com/catalog/SEI-Packaging.pdf?src-supplier=Digi-Key, ComponentLink3Description=https://www.seielect.com/Catalog/SEI-RMCF_RMCP.pdf?src-supplier=Digi-Key, ComponentLink3URL=https://www.seielect.com/Catalog/SEI-RMCF_RMCP.pdf?src-supplier=Digi-Key, Contact Plating=Tin,Matte, Features="Automotive AEC-Q200", Height=0.022inch, Length=0.061inch, Mount="Surface Mount", Number of Terminations=2, Packaging="Tape and Reel", Pricing 1="1=0.10000, 10=0.01700, 100=0.00680, 1000=0.00305, 2500=0.00264, 5000=0.00218 (USD)", Radiation Hardening=No, RoHS=Yes, RoHS Compliant=Yes, Series=RMCF, Stock 1=6, Supplier 1=Digi-Key, Width=0.031inch
R6: library part "RES 12k 0603 1% 0W1", "TE CONNECTIVITY - CRGCQ0603F12K - SMD Chip Resistor, 0603 [1608 Metric], 12 kohm, CRGCQ Series, 75 V, Thick Film, 100 mW", Manufacturer 1="TE Connectivity", Manufacturer Part Number 1=CRGCQ0603F12K, Supplier Part Number 1=A129701CT-ND, Category="Chip SMD Resistors", ComponentLink1Description=https://4donline.ihs.com/images/VipMasterIC/IC/TYEL/TYEL-S-A0004929575/TYEL-S-A0004929575-1.pdf?hkey=52A5661711E402568146F3353EA87419&src-supplier=Farnell, ComponentLink1URL=https://4donline.ihs.com/images/VipMasterIC/IC/TYEL/TYEL-S-A0004929575/TYEL-S-A0004929575-1.pdf?hkey=52A5661711E402568146F3353EA87419&src-supplier=Farnell, ComponentLink2Description=https://4donline.ihs.com/images/VipMasterIC/IC/TYEL/TYEL-S-A0004929575/TYEL-S-A0004929575-1.pdf?hkey=52A5661711E402568146F3353EA87419&src-supplier=Element14, ComponentLink2URL=https://4donline.ihs.com/images/VipMasterIC/IC/TYEL/TYEL-S-A0004929575/TYEL-S-A0004929575-1.pdf?hkey=52A5661711E402568146F3353EA87419&src-supplier=Element14, ComponentLink3Description=https://4donline.ihs.com/images/VipMasterIC/IC/TYEL/TYEL-S-A0004929575/TYEL-S-A0004929575-1.pdf?hkey=52A5661711E402568146F3353EA87419&src-supplier=Newark, ComponentLink3URL=https://4donline.ihs.com/images/VipMasterIC/IC/TYEL/TYEL-S-A0004929575/TYEL-S-A0004929575-1.pdf?hkey=52A5661711E402568146F3353EA87419&src-supplier=Newark, Pricing 1="1=0.10000, 10=0.03100, 100=0.01260, 1000=0.00564, 2500=0.00489 (USD)", RoHS=Yes, RoHS Compliant=Yes, Stock 1=77509, Supplier 1=Digi-Key
U1: "IC BUFF/DVR TRI-ST DUAL 20SOIC", Case/Package=SOIC, High Level Output Current=-24mA, Low Level Output Current=24mA, Manufacturer 1="Texas Instruments", Max Operating Temperature=85°C, Max Supply Voltage=5.5V, Min Operating Temperature=-40°C, Min Supply Voltage=4.5V, Operating Supply Voltage=5V, Package Quantity=2000, Quiescent Current=4uA, Supplier Part Number 1=296-1070-1-ND, Category="Buffers, Drivers and Transceivers", ComponentLink1Description=https://datasheet.ciiva.com/15094/getdatasheetpartid-81574-15094573.pdf?src-supplier=Verical, ComponentLink1URL=https://datasheet.ciiva.com/15094/getdatasheetpartid-81574-15094573.pdf?src-supplier=Verical, ComponentLink2Description=https://datasheet.ciiva.com/41456/001016137-da-01-en-ic-b-dvr-sn74a-sn74act244dwr-soic-20-tid-41456408.pdf?src-supplier=Conrad, ComponentLink2URL=https://datasheet.ciiva.com/41456/001016137-da-01-en-ic-b-dvr-sn74a-sn74act244dwr-soic-20-tid-41456408.pdf?src-supplier=Conrad, ComponentLink3Description=https://datasheet.ciiva.com/26861/sn74act244dwr-26861935.pdf?src-supplier=IIIC, ComponentLink3URL=https://datasheet.ciiva.com/26861/sn74act244dwr-26861935.pdf?src-supplier=IIIC, ComponentLink4Description=https://datasheet.ciiva.com/1840/sn74act244-1840146.pdf?src-supplier=Digi-Key, ComponentLink4URL=https://datasheet.ciiva.com/1840/sn74act244-1840146.pdf?src-supplier=Digi-Key, ComponentLink5Description=https://datasheet.ciiva.com/1840/sn74act244-1840147.pdf?src-supplier=Digi-Key, ComponentLink5URL=https://datasheet.ciiva.com/1840/sn74act244-1840147.pdf?src-supplier=Digi-Key, ComponentLink6Description=https://datasheet.ciiva.com/1840/sn74act244-1840148.pdf?src-supplier=Digi-Key, ComponentLink6URL=https://datasheet.ciiva.com/1840/sn74act244-1840148.pdf?src-supplier=Digi-Key, ComponentLink7Description=https://datasheet.ciiva.com/14300/sn74act244-14300873.pdf?src-supplier=Avnet, ComponentLink7URL=https://datasheet.ciiva.com/14300/sn74act244-14300873.pdf?src-supplier=Avnet, ComponentLink8Description=https://datasheet.ciiva.com/14301/sn74act244-14301287.pdf?src-supplier=Avnet, ComponentLink8URL=https://datasheet.ciiva.com/14301/sn74act244-14301287.pdf?src-supplier=Avnet, ComponentLink9Description=https://datasheet.ciiva.com/46415/1834169-46415260.pdf?src-supplier=Element14, ComponentLink9URL=https://datasheet.ciiva.com/46415/1834169-46415260.pdf?src-supplier=Element14, ComponentLink10Description=https://datasheet.ciiva.com/16531/sn74act244-16531854.pdf?src-supplier=Avnet+Asia, ComponentLink10URL=https://datasheet.ciiva.com/16531/sn74act244-16531854.pdf?src-supplier=Avnet+Asia, ComponentLink11Description=https://datasheet.ciiva.com/26263/sn74act244-26263496.pdf?src-supplier=Avnet+Europe, ComponentLink11URL=https://datasheet.ciiva.com/26263/sn74act244-26263496.pdf?src-supplier=Avnet+Europe, Contact Plating=Gold, Height=2.35mm, Lead Free="Lead Free", Length=12.8mm, Logic Function=Buffer,Inverting, Manufacturer Part Number 1=SN74ACT244DWR, Mount="Surface Mount", Number of Bits=8, Number of Bits per Element=4, Number of Channels=8, Number of Elements=2, Number of Input Lines=8, Number of Inputs=8, Number of Output Lines=8, Number of Outputs=8, Number of Pins=20, Packaging="Tape and Reel", Polarity=Non-Inverting, Pricing 1="1=0.83000, 10=0.73100, 25=0.68680, 100=0.56050, 250=0.52060, 500=0.44308, 1000=0.36575 (USD)", Propagation Delay=9ns, Radiation Hardening=No, REACH SVHC="No SVHC", RoHS=Yes, RoHS Compliant=Yes, Stock 1=9800, Supplier 1=Digi-Key, Turn-On Delay Time=10.5ns, Width=7.52mm
U2: "ON SEMICONDUCTOR         NCP3064BDR2G             DC-DC Switching Buck, Boost, Inverting Regulator, Adj., 3V-40Vin, 1.25V-40V/1.5A out, 150kHz, SOIC-8", Case/Package=SOIC, Manufacturer 1="ON Semiconductor", Max Input Voltage=40V, Max Operating Temperature=70°C, Max Output Current=1.5A, Min Input Voltage=3V, Min Operating Temperature=-40°C, Min Output Voltage=1.25V, Package Quantity=1, Supplier Part Number 1=NCP3064BDR2GOSCT-ND, Switching Frequency=150kHz, Switching Frequency-Max=190kHz, Category="Voltage Regulators - Switching", ComponentLink1Description=https://datasheet.ciiva.com/2025/ncp3064-d-2025232.pdf?src-supplier=Digi-Key, ComponentLink1URL=https://datasheet.ciiva.com/2025/ncp3064-d-2025232.pdf?src-supplier=Digi-Key, ComponentLink2Description=https://datasheet.ciiva.com/26896/ncp3064bdr2g-26896036.pdf?src-supplier=IIIC, ComponentLink2URL=https://datasheet.ciiva.com/26896/ncp3064bdr2g-26896036.pdf?src-supplier=IIIC, ComponentLink3Description=https://datasheet.ciiva.com/2025/ncp3064-d-2025231.pdf?src-supplier=Digi-Key, ComponentLink3URL=https://datasheet.ciiva.com/2025/ncp3064-d-2025231.pdf?src-supplier=Digi-Key, ComponentLink4Description=https://datasheet.ciiva.com/2025/ncp3064-d-2025233.pdf?src-supplier=Digi-Key, ComponentLink4URL=https://datasheet.ciiva.com/2025/ncp3064-d-2025233.pdf?src-supplier=Digi-Key, ComponentLink5Description=https://datasheet.ciiva.com/8270/ncp3064-d-8270220.pdf?src-supplier=Avnet, ComponentLink5URL=https://datasheet.ciiva.com/8270/ncp3064-d-8270220.pdf?src-supplier=Avnet, Efficiency=86%, Halogen Free="Halogen Free", Height=1.5mm, Lead Free="Lead Free", Length=5mm, Manufacturer Part Number 1=NCP3064BDR2G, Max Output Voltage=40V, Mount="Surface Mount", Number of Outputs=1, Number of Pins=8, Operating Supply Voltage=40V, Output Current=1.5A, Output Type=Adjustable, Output Voltage=40V, Packaging="Tape and Reel", Pricing 1="1=1.29000, 10=1.15700, 25=1.09800, 100=0.90180, 250=0.84300, 500=0.74498, 1000=0.64732 (USD)", Radiation Hardening=No, REACH SVHC="No SVHC", RoHS=Yes, RoHS Compliant=Yes, Series=-, Stock 1=1017, Supplier 1=Digi-Key, Synchronous Rectifier=No, Width=4mm

## Free pads (board coordinates)
  round 1.6 hole 1.2 mask+0.05: ""(0.9,7.9) ""(0.9,12.9) ""(0.9,17.9) ""(0.9,22.9) ""(0.9,27.9) ""(44.5,2.9) ""(44.5,7.9) ""(44.5,12.9) ""(44.5,17.9) ""(44.5,22.9) ""(44.5,27.9)

## Nets (pads, with @x,y where several pads share a name; then routed paths per layer and width w, separated by ;. In a path a pad name is that pad's centre, name@x,y a point inside that pad or via, vN(x,y) a via of type N, cw(c..) or ccw(c..) an arc to the next point about the centre after c; other vN are vias at no path point)
+3V3: A1.2 C1.1 C6.2 L1.1 R1.2 R4.2
C: BR1.3
G: K1.4
G2: K2.4
G3: K3.4
GND: A1.1 A1.15 A1.38 BR1.2 C1.2 C2.2 C3.2 C4.1 C5.2 C6.1 C7.1 D1.2 K1.3 K2.3 K3.3 K4.3 K5.3 P1.1 P2.1 P3.1 R5.1 U2.4
NetA1_3: A1.3 C3.1 P3.2 R1.1
NetA1_25: A1.25 P2.2
NetA1_34: A1.34 P1.3
NetA1_35: A1.35 P1.2
NetC7_2: C7.2 R6.1 U2.3
NetD1_1: D1.1 L1.2 R6.2 U2.2
NetR2_2: R2.2 U2.8
NetR3_1: R3.1 U2.1 U2.7
NetR4_1: R4.1 R5.2 U2.5
R: BR1.4 K1.6 K2.6 K3.6 K4.6 K5.6
V_RECT: BR1.1 C4.2 C5.1 R2.1 R3.2 U2.6
W1: K5.4
Y: K4.4
pads on no net: A1.4 A1.5 A1.6 A1.7 A1.8 A1.9 A1.10 A1.11 A1.12 A1.13 A1.14 A1.16 A1.17 A1.18 A1.19 A1.20 A1.21 A1.22 A1.23 A1.24 A1.26 A1.27 A1.28 A1.29 A1.30 A1.31 A1.32 A1.33 A1.36 A1.37 A1.39 C2.1 K1.1 K2.1 K3.1 K4.1 K5.1 U1.1 U1.2 U1.3 U1.4 U1.5 U1.6 U1.7 U1.8 U1.9 U1.10 U1.11 U1.12 U1.13 U1.14 U1.15 U1.16 U1.17 U1.18 U1.19 U1.20

## Silkscreen, mask and mechanical layers (free items; w line width, h text height)
Top Overlay:
  lines w0.15: 10.9,0 10.9,30.5 ; 12.9,0 12.9,30.5 ; 32.5,0 32.5,30.5 ; 34.5,0 34.5,30.5
Mechanical 1:
  lines w0.15: -0.003,1.5 ccw(c1.5,1.5) 1.5,-0.003 ; -0.003,29 cw(c1.5,29) 1.5,30.503 ; 0,1.5 0,29 ; 1.5,0 43.9,0 ; 1.5,30.5 43.9,30.5 ; 43.9,-0.003 ccw(c43.9,1.5) 45.403,1.5 ; 43.9,30.503 cw(c43.9,29) 45.403,29 ; 45.4,1.5 45.4,29